# Altium PCB PCB1ControlDriver.PcbDoc
Units mm, origin at the board's own origin, x right, y up, seen from the top; angles counter-clockwise.
Board outline 137.5 x 77.5 mm, 2 copper layers (Top Layer, Bottom Layer), stack 1.671 mm thick; 51 components, 45 nets, 190 pads, 61 vias.
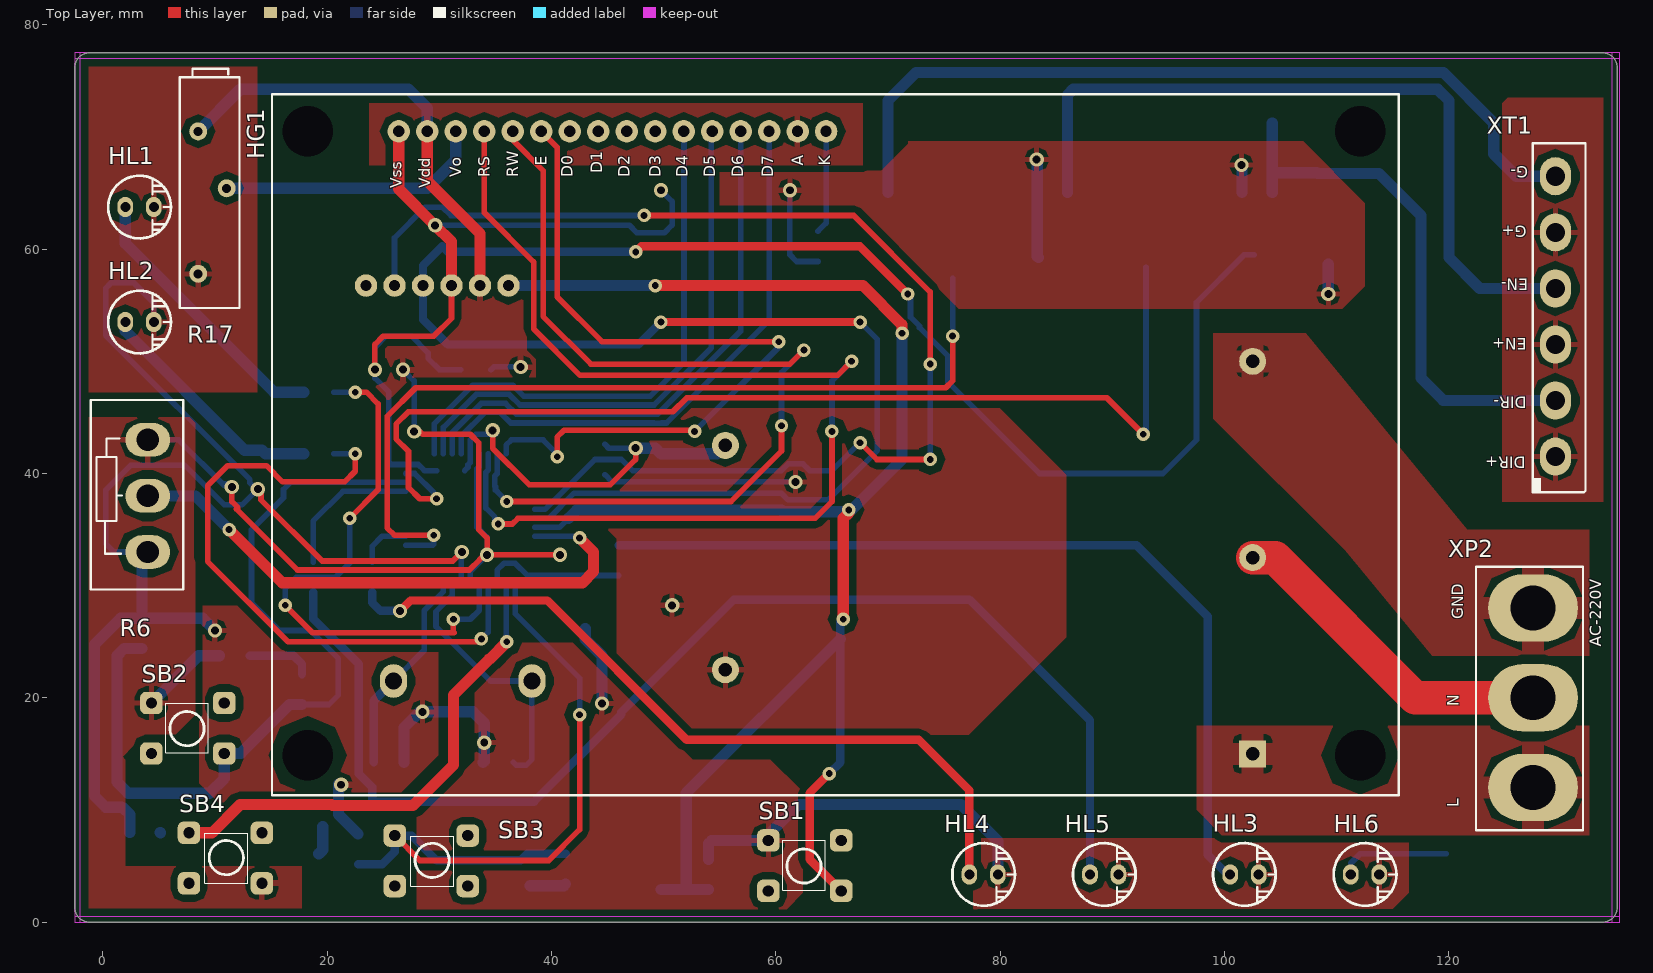
[diagram p0: Top Layer view]
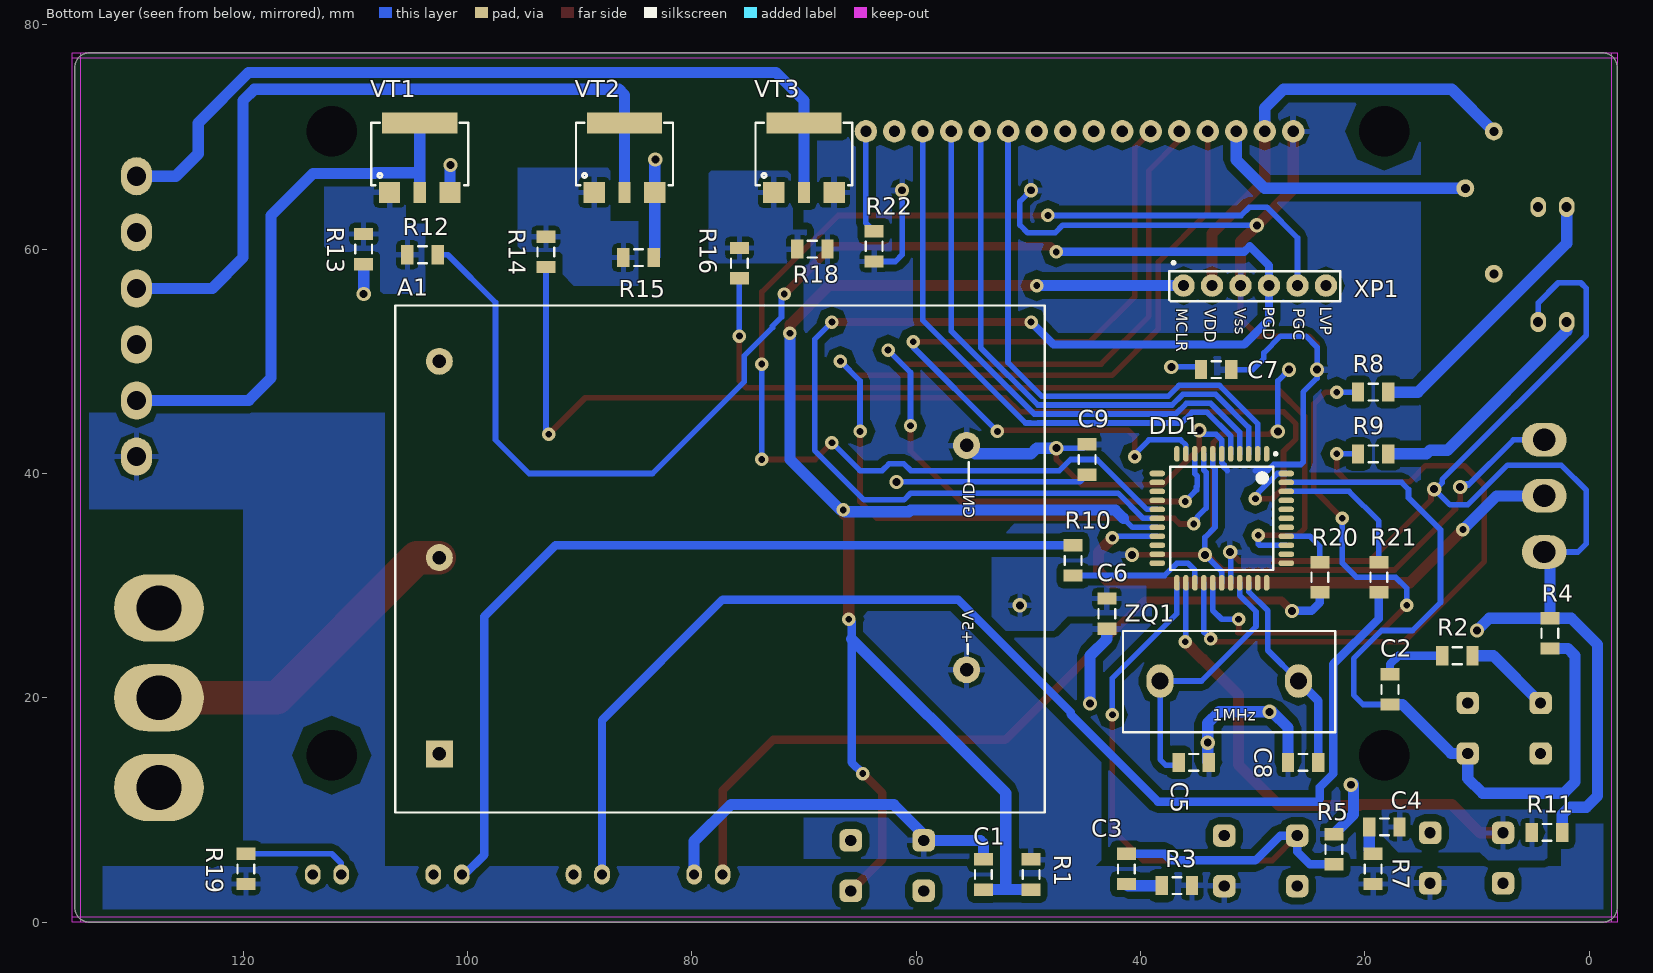
[diagram p1: Bottom Layer view, seen from below]

## Layer stack, top to bottom
Top Solder: solder mask 0.0102, Solder Resist, Dk 3.5
Top Layer: signal copper 0.0356
Dielectric 1: dielectric 1.6, FR-4, Dk 4.8
Bottom Layer: signal copper 0.0356
Bottom Solder: solder mask 0.0102, Solder Resist, Dk 3.5

## Board outline
-2.5,1.27 -2.5,76.23 cw(c-1.23,76.23) -1.23,77.5 133.73,77.5 cw(c133.73,76.23) 135,76.23 135,1.27 cw(c133.73,1.27) 133.73,0 -1.23,0 cw(c-1.23,1.27)

## Design rules (kind name [scope] priority, off if disabled: settings)
Clearance [All] p1: gap=0.5 ignorepadtopadclearanceinfootprint=FALSE except(0.3: Arc-Track Arc-SMDPad Track-Track Track-SMDPad SMDPad-SMDPad; 0.4: Arc-Via Track-Via; 0.6: Arc-Poly Arc-Region Track-Poly Track-Region SMDPad-Poly SMDPad-Region THPad-Poly THPad-Region Via-Poly Via-Region Fill-Poly Fill-Region Poly-Poly Poly-Region Region-Region; 1: Arc-Hole Track-Hole SMDPad-Hole THPad-Hole Via-Hole Fill-Hole Poly-Hole Region-Hole Text-Hole)
ComponentClearance [All] p1: gap=0.254 collisioncheckmode=3 verticalgap=0.1 showdistances=FALSE
PlaneClearance [InNetClass('POWER_AC')] p1: clearance=2
PlaneClearance PlaneClearance_5V [InNetClass('5V')] p2: clearance=0.6
PlaneClearance PlaneClearance_OUT [InNetClass('OUTPUT')] p3: clearance=0.6
PlaneClearance PlaneClearance_OTHER [InNetClass('Other')] p4: clearance=0.6
PlaneClearance PlaneClearance_CNET [InNetClass('ControlNet')] p5: clearance=0.6
PlaneConnect PlaneConnect_AC [InNetClass('POWER_AC')] p1: planeconnectstyle=Relief reliefexpansion=0.8 reliefentries=4 reliefconductorwidth=0.8 reliefairgap=0.4
PlaneConnect PlaneConnect_5V [InNetClass('5V')] p2: pad.planeconnectstyle=Relief pad.reliefexpansion=0.5 pad.reliefentries=4 pad.reliefconductorwidth=0.4 pad.reliefairgap=0.3 via.planeconnectstyle=Relief via.reliefexpansion=0.4 via.reliefentries=4 via.reliefconductorwidth=0.4 via.reliefairgap=0.3
PlaneConnect PlaneConnect_OUT [InNetClass('OUTPUT')] p3: pad.planeconnectstyle=Relief pad.reliefexpansion=0.5 pad.reliefentries=4 pad.reliefconductorwidth=0.4 pad.reliefairgap=0.3 via.planeconnectstyle=Relief via.reliefexpansion=0.4 via.reliefentries=4 via.reliefconductorwidth=0.4 via.reliefairgap=0.3
PlaneConnect PlaneConnect_OTHER [InNetClass('Other')] p4: pad.planeconnectstyle=Relief pad.reliefexpansion=0.5 pad.reliefentries=4 pad.reliefconductorwidth=0.4 pad.reliefairgap=0.3 via.planeconnectstyle=Relief via.reliefexpansion=0.4 via.reliefentries=4 via.reliefconductorwidth=0.4 via.reliefairgap=0.3
PlaneConnect PlaneConnect_CNET [InNetClass('ControlNet')] p5: pad.planeconnectstyle=Relief pad.reliefexpansion=0.5 pad.reliefentries=4 pad.reliefconductorwidth=0.4 pad.reliefairgap=0.3 via.planeconnectstyle=Relief via.reliefexpansion=0.4 via.reliefentries=4 via.reliefconductorwidth=0.4 via.reliefairgap=0.3
PolygonConnect [InNetClass('POWER_AC')] p1: connectstyle=Relief reliefconductorwidth=2 reliefentries=4 polygonreliefangle="90 Angle" airgapwidth=0.5
PolygonConnect PolygonConnect_5V [InNetClass('5V')] p2: connectstyle=Relief reliefconductorwidth=0.5 reliefentries=4 polygonreliefangle="90 Angle" airgapwidth=0.4
PolygonConnect PolygonConnect_OUT [InNetClass('OUTPUT')] p3: connectstyle=Relief reliefconductorwidth=0.5 reliefentries=4 polygonreliefangle="90 Angle" airgapwidth=0.4
PolygonConnect PolygonConnect_OTHER [InNetClass('Other')] p4: connectstyle=Relief reliefconductorwidth=0.5 reliefentries=4 polygonreliefangle="90 Angle" airgapwidth=0.4
PolygonConnect PolygonConnect_CNET [InNetClass('ControlNet')] p5: connectstyle=Relief reliefconductorwidth=0.5 reliefentries=4 polygonreliefangle="90 Angle" airgapwidth=0.4
RoutingVias [InNetClass('ControlNet')] p1: holewidth=0.6 width=1.2 viastyle="Through Hole" minholewidth=0.6 minwidth=1.2 maxholewidth=0.6 maxwidth=1.2
RoutingVias RoutingVias_OUT [InNetClass('OUTPUT')] p2: holewidth=1 width=1.8 viastyle="Through Hole" minholewidth=1 minwidth=1.8 maxholewidth=1 maxwidth=1.8
RoutingVias RoutingVias_CNET [(InNetClass('5V') AND InNetClass('ControlNet') AND InNetClass('Other'))] p3: holewidth=0.6 width=1.2 viastyle="Through Hole" minholewidth=0.6 minwidth=1.2 maxholewidth=0.6 maxwidth=1.2
SolderMaskExpansion [All] p1: expansion=0.102
Width AC_LEVEL [InNetClass('POWER_AC')] p1: maxlimit=5 minlimit=2 preferedwidth=4
Width LEVELOUT [InNetClass('OUTPUT')] p2: maxlimit=2 minlimit=1 preferedwidth=1.5
Width Level5V [(InNetClass('5V') AND InNetClass('ControlNet') AND InNetClass('Other'))] p3: maxlimit=1.5 minlimit=0.5 preferedwidth=1
27 further rules are at their usual default settings.

## Classes and differential pairs
net class POWER_AC: NetA1_1 NetA1_2 PGND
net class 5V: GND VCC
net class OUTPUT: DIR- EN- pulse-
net class ControlNet: BUT_DIR_LEFT BUT_DIR_RIGHT BUT_ON_OFF DB4 DB5 DB6 DB7 DIR DIR_LEFT DIR_RIGHT E EN IND_OFF IND_ON ON_OFF_GENERATOR PGC pulse REG RESET RS RW Vee
net class Other: NetC2_1 NetC3_1 NetC4_1 NetC5_2 NetC8_2 NetHG1_16 NetHL1_1 NetHL2_1 NetHL3_1 NetHL4_1 NetHL5_1 NetHL6_1 NetR12_2 NetR14_2 NetR16_2

## Components (designator, comment, footprint, x,y, rotation, side; value= is the part's Value field where it differs from the comment)
A1 "KAM0705" KAM705 102.5,32.5 r90 bottom value=220V/5V
C1 "47nF" CAP1206 54,4.25 r90 bottom
C2 "47nF" CAP1206 17.75,20.75 r270 bottom
C3 "47nF" CAP1206 41.25,4.75 r90 bottom
C4 "47nF" CAP1206 18.25,8.5 r180 bottom
C5 "15pF" CAP1206 35.25,14.25 r0 bottom
C6 "100nF" CAP1206 43,27.5 r270 bottom
C7 "100nF" CAP1206 33.25,49.25 r180 bottom
C8 "15pF" CAP1206 25.5,14.25 r180 bottom
C9 "100nF" CAP1206 44.75,41.25 r90 bottom
DD1 "PIC16F877A" TQFP80P1200X1200X120-44N 32.75,36 r270 bottom
HG1 "LM044L" LCD2004 26.378,70.5 r0 top
HL1 "GNL-3014" GNL-3014 2,63.75 r0 top value=RED
HL2 "GNL-3014" GNL-3014 2,53.5 r0 top value=RED
HL3 "GNL-3014" GNL-3014 100.5,4.25 r0 top value=RED
HL4 "GNL-3014" GNL-3014 77.25,4.25 r0 top value=RED
HL5 "GNL-3014" GNL-3014 88,4.25 r0 top value=RED
HL6 "GNL-3014" GNL-3014 111.25,4.25 r0 top value=RED
R1 "10k" 1206 49.75,4.25 r270 bottom value=1k
R2 "220" 1206 11.75,23.75 r180 bottom
R3 "220" 1206 36.75,3.25 r180 bottom
R4 "10k" 1206 3.5,25.75 r90 bottom
R5 "10k" 1206 22.75,6.5 r90 bottom
R6 "1kОм" "KC/C 16K1" 4,43 r270 top value=1000
R7 "220" 1206 19.25,4.75 r270 bottom
R8 "470" 1206 19.25,47.25 r180 bottom
R9 "470" 1206 19.25,41.75 r180 bottom
R10 "470" 1206 46,32.25 r90 bottom
R11 "10k" 1206 3.75,8 r180 bottom
R12 "470" 1206 104,59.5 r0 bottom
R13 "10k" 1206 109.25,60 r270 bottom
R14 "470" 1206 93,59.75 r90 bottom
R15 "10k" 1206 84.75,59.25 r180 bottom
R16 "470" 1206 75.75,58.75 r90 bottom
R17 "10kОм" 3006P 8.5,57.8 r90 top
R18 "10k" 1206 69.25,60 r180 bottom
R19 "470" 1206 119.75,4.75 r90 bottom
R20 "470" 1206 24,30.75 r270 bottom
R21 "470" 1206 18.75,30.75 r270 bottom
R22 "220" 1206 63.75,60.25 r90 bottom
SB1 "KAN0611-0901B" KLS2 62.5,5 r0 top value=100V
SB2 "KAN0611-0901B" KLS2 7.5,17.25 r0 top value=100V
SB3 "KAN0611-0901B" KLS2 29.355,5.506 r180 top value=100V
SB4 "KAN0611-0901B" KLS2 11,5.75 r180 top value=100V
VT1 "BCP56" SOT223 104.25,65.05 r180 bottom
VT2 "BCP56" SOT223 86,65.05 r180 bottom
VT3 "BCP56" SOT223 70,65.05 r180 bottom
XP1 "PLS-6" DS1021-6 36.16,56.75 r180 bottom value=100V
XP2 "AC-014" "Power AC-014" 127.5,12 r90 top value=220V
XT1 "KLS2-EDR-500-6P" KLS2-EDR-500-6P 129.5,41.5 r90 top value=15A300V
ZQ1 "1MHz" HC-51U 38.25,21.5 r180 bottom

## Footprints (in the part's own frame and the unit in brackets; to place one, negate y for a bottom-side part, rotate by r counter-clockwise, add the part's x,y. Pads: shape width x height; smd on the part's side, far side on the other; paste and mask are expansions set on the pad)
1206 [mm]
  rect 1.1x1.7 smd: 1(-1.35,0) 2(1.35,0)
  silkscreen extent -0.4,-0.75 0.4,0.75, body extent -1.55,-0.83 1.55,0.83, height 0.67
3006P [mm]
  round 1.6 hole 0.8: 1(0,0) 2(7.62,-2.54) 3(12.7,0)
  silkscreen extent -3.05,-3.68 18.29,1.65, body extent -3.05,-3.43 17.52,1.4, height 6.85
CAP1206 [mm]
  rect 1.1x1.7 smd: 1(-1.35,0) 2(1.35,0)
  silkscreen extent -0.4,-0.75 0.4,0.75, body extent -1.6,-0.8 1.6,0.8, height 1.25
DS1021-6 [mm]
  round 2 hole 1: 1(0,0) 2(2.54,0) 3(5.08,0) 4(7.62,0) 5(10.16,0) 6(12.7,0)
  silkscreen extent -1.27,-1.4 13.97,2.16, body extent -1.27,-1.27 13.97,7.35, height 5.45
GNL-3014 [mm]
  oval 1.4x1.8 hole 0.9: 1(0,0) 2(2.54,0)
  silkscreen extent -1.52,-2.79 4.06,2.79, body extent -0.72,-1.5 3.26,1.99, height 6.38
HC-51U [mm]
  oval 2.4x3 hole 1.5: 1(0,0) 2(12.34,0)
  silkscreen extent -3.3,-4.57 15.62,4.45, body extent -3.35,-4.61 15.65,4.39, height 20.5
KAM705 [mm]
  rect 2.4x2.4 hole 1.2: 1(-17.5,0)
  round 2.4 hole 1.2: 2(0,0) 3(17.5,0) 4(-10,-47) 5(10,-47)
  silkscreen extent -22.73,-53.98 22.48,3.94, body extent -22.5,-54 22.5,4, height 2.5
"KC/C 16K1" [mm]
  oval 3x4 hole 2: 1(0,0) 2(5,0) 3(10,0)
  silkscreen extent -3.56,-5.08 13.33,3.18, body extent -3.5,-33.97 13.4,5.33, height 23.45
KLS2 [mm]
  rrect50% 2x2 hole 1: 1(-3.175,2.286) 2(3.325,2.286) 3(-3.175,-2.214) 4(3.325,-2.214)
  silkscreen extent -1.91,-2.16 1.9,2.29, body extent -3.12,-3 3.38,3, height 7.5
KLS2-EDR-500-6P [mm]
  oval 3.4x2.8 hole 1.7: 1(0,0) 2(5,0) 3(10,0) 4(15,0) 5(20,0) 6(25,0)
  silkscreen extent -3.17,-2.67 27.94,2.03, body extent -3,-20.69 27.49,1.64, height 18.12
LCD2004 [mm]
  round 0 hole 4.5: 0(-8.128,-55.626) 0(-8.128,0) 0(85.725,-55.626) 0(85.725,0)
  round 2 hole 1: 1(0,0) 2(2.54,0) 3(5.08,0) 4(7.62,0) 5(10.16,0) 6(12.7,0) 7(15.24,0) 8(17.78,0) 9(20.32,0) 10(22.86,0) 11(25.4,0) 12(27.94,0) 13(30.48,0) 14(33.02,0) 15(35.56,0) 16(38.1,0)
  silkscreen extent -11.3,-59.18 89.15,3.3, body extent -11.34,-59.2 89.16,3.3, height 13.75
"Power AC-014" [mm]
  oval 6x8 hole 4: 1(0,0) 2(8,0) 3(16,0)
  silkscreen extent -3.81,-4.44 19.68,5.08
SOT223 [mm]
  rect 1.9x1.9 smd: 1(-2.7,0) 3(2.7,0)
  rect 1.1x1.9 smd: 2(0,0)
  rect 6.7x1.9 smd: 2(0,6.2)
  silkscreen extent -4.32,0.63 4.32,6.22, body extent -3.25,0.06 3.25,7.06, height 1.7
TQFP80P1200X1200X120-44N [mm] "TQFP, 44-Leads, Body 10,00x10,00mm, Pitch 0,80mm, IPC Medium Density"
  oval 1.4x0.5 smd: 1(-5.75,4) 2(-5.75,3.2) 3(-5.75,2.4) 4(-5.75,1.6) 5(-5.75,0.8) 6(-5.75,0) 7(-5.75,-0.8) 8(-5.75,-1.6) 9(-5.75,-2.4) 10(-5.75,-3.2) 11(-5.75,-4) 23(5.75,-4) 24(5.75,-3.2) 25(5.75,-2.4) 26(5.75,-1.6) 27(5.75,-0.8) 28(5.75,0) 29(5.75,0.8) 30(5.75,1.6) 31(5.75,2.4) 32(5.75,3.2) 33(5.75,4)
  oval 0.5x1.4 smd: 12(-4,-5.75) 13(-3.2,-5.75) 14(-2.4,-5.75) 15(-1.6,-5.75) 16(-0.8,-5.75) 17(0,-5.75) 18(0.8,-5.75) 19(1.6,-5.75) 20(2.4,-5.75) 21(3.2,-5.75) 22(4,-5.75) 34(4,5.75) 35(3.2,5.75) 36(2.4,5.75) 37(1.6,5.75) 38(0.8,5.75) 39(0,5.75) 40(-0.8,5.75) 41(-1.6,5.75) 42(-2.4,5.75) 43(-3.2,5.75) 44(-4,5.75)
  silkscreen extent -5.87,-4.6 4.6,4.92, body extent -6,-5.97 6,6.03, height 1.1

## Part data
A1: Manufacturer="CHINFA ELECTRONICS", Package=48x45x18.5, Part Number=KAM0705, Price=23, Quantity=1, ShoppingPlace=https://www.ru-chipdip.by/product/kam-0705
C1 C2 C3 C4: library part Capasitor, Manufacturer="FAITHFULL LINK", Package=1206, Part Number=120647nY5V-50V, Voltage=50V, Price=0,025, Quantity=4, ShoppingPlace=http://belchip.by/product/?selected_product=03137
C5 C8: library part Capasitor, Manufacturer=NPO, Package=1206, Part Number=1206150NPO, Voltage=1000V, Price=0,035, Quantity=2, ShoppingPlace=http://belchip.by/product/?selected_product=00257
C6 C7 C9: library part Capasitor, Manufacturer=Samsung, Package=1206, Part Number=CL31B104KBCNNNC, Voltage=50V, Price=0,015, Quantity=3, ShoppingPlace=http://belchip.by/product/?selected_product=03137
DD1: Manufacturer=Micchip, Package=TQFP-44, Part Number=PIC16F877A, Price=2.76, Quantity=1, ShoppingPlace=https://ru.aliexpress.com/item/Free-Shipping-5pcs-lot-PIC16F877A-PIC16F877A-I-PT-Microcontrollers-SMD-TQFP-44-new-original/32589109618.html?s=p&ws_ab_test=searchweb0_0,searchweb201602_2_10152_10151_10065_10344_10068_5722815_10342_10343_10340_5722915_10341_5722615_10697_10696_10084_10083_10618_10307_5722715_10059_10534_308_100031_10103_441_10624_10623_10622_5722515_10621_10620,searchweb201603_1,ppcSwitch_5&algo_expid=19ea4dca-365d-404e-8202-e740e16aa93f-5&algo_pvid=19ea4dca-365d-404e-8202-e740e16aa93f&transAbTest=ae803_2&priceBeautifyAB=0
HG1: Manufacturer=HITACHI, Package=16x2.54, Part Number=LM044L-HD44780U, Price=6.36, Quantity=1, ShoppingPlace=https://ru.aliexpress.com/item/LCD-Module-Display-2004-204-HD44780-Yellow-Green-Blacklight-FOR-ARDUINO/32627610997.html?ws_ab_test=searchweb0_0,searchweb201602_2_10152_10151_10065_10344_10068_5722815_10342_10343_10340_5722915_10341_5722615_10697_10696_10084_10083_10618_10307_5722715_10059_10534_308_100031_10103_441_10624_10623_10622_5722515_10621_10620,searchweb201603_1,ppcSwitch_5&algo_expid=81ba670d-1ac6-4fbd-8476-00369042280d-42&algo_pvid=81ba670d-1ac6-4fbd-8476-00369042280d&transAbTest=ae803_2&priceBeautifyAB=0
HL1 HL2 HL3 HL4 HL5 HL6: library part LED, Manufacturer=G-NOR, Package=GNL, Part Number=GNL-3014SRD, Price=0.04, Quantity=6, ShoppingPlace=http://belchip.by/product/?selected_product=00813
R1: library part Resistor, Manufacturer="Royal Ohm", Package=1206, Part Number=RC1206FR-071KL, Power=0,25W, Price=0,02, Quntity=4, ShoppingPlace=http://belchip.by/product/?selected_product=19295
R2 R3 R7 R22: library part Resistor, Manufacturer=YAGEO, Package=1206, Part Number=RC1206JR-07220L, Power=0,25W, Price=0,15, Quntity=4, ShoppingPlace=http://belchip.by/product/?selected_product=01368
R4 R5 R11 R13 R15 R18: library part Resistor, Manufacturer=YAGEO, Package=1206, Part Number=RC1206JR-0710KL, Power=0,25W, Price=0,15, Quntity=4, ShoppingPlace=http://belchip.by/product/?selected_product=31101
R6: library part POT-HG, Manufacturer=RUICHI, Package=5x5, Part Number=16K1, Power=0,125W, Price=0,6, Quantity=1, ShoppingPlace=http://belchip.by/product/?selected_product=04561
R8 R9 R10 R12 R14 R16 R19 R20 R21: library part Resistor, Manufacturer=YAGEO, Package=1206, Part Number=RC1206JR-07470RL, Power=0,25W, Price=0,15, Quntity=5, ShoppingPlace=http://belchip.by/product/?selected_product=32449
R17: library part POT, Manufacturer=Bours, Package=3006, Part Number=3006-103-Z-LF, Power=0,125W, Price=0,445, Quantity=1, ShoppingPlace=http://belchip.by/product/?selected_product=32831
SB1 SB2 SB3 SB4: library part Button, Manufacturer=RUICHI, Package=T112, Part Number=KAN0611-0901B, Price=0,05, Quantity=4, ShoppingPlace=http://belchip.by/product/?selected_product=14924
VT1 VT2 VT3: library part BCP56-16, Manufacturer="NXP Semiconductors", Package=SOT223, Part Number=BCP56-16, Price=BCP56, Quantity=2, ShoppingPlace=http://belchip.by/product/?selected_product=12583
XP1: library part PLS-6-1, Manufacturer=RUICHI, Package=DS2021-6, Part Number=PLS-40, Price=0,12, Quantity=1, ShoppingPlace=http://belchip.by/product/?selected_product=02009
XP2: library part "Power Connector AC-014", Manufacturer=RUICHI, Package=AC-015-8mm-step, Part Number=AC-014, Price=1.62, Quantity=1, ShoppingPlace=http://belchip.by/product/?selected_product=31383
XT1: Manufacturer=KLS, Package=KLS2-6, Part Number=KLS2-EDR-500-6P, Price=0,13, Quantity=1, ShoppingPlace=http://belchip.by/product/?selected_product=03190
ZQ1: library part Rzanator, Manufacturer=CHina, Package=HC-51, Part Number=HC-51, Price=13, Quantity=1, ShoppingPlace=https://ru.aliexpress.com/item/1-MHz-Quartz-Crystal-Resonator-HC-51-U-1-000-MHz-1000-KHz/32542776281.html?ws_ab_test=searchweb0_0,searchweb201602_2_10152_10151_10065_10344_10068_10342_10343_10340_10341_10697_10696_10084_5722520_10083_10618_10307_10059_5722620_5722920_10534_308_5722720_5722820_100031_10103_441_10624_10623_10622_10621_10620,searchweb201603_68,ppcSwitch_5&algo_expid=89d4295e-121a-47e9-b7f5-26405723b7a9-0&algo_pvid=89d4295e-121a-47e9-b7f5-26405723b7a9&transAbTest=ae803_2&priceBeautifyAB=0

## Via types
v1: diameter 1.2, hole 0.6, Top Layer to Bottom Layer, 36 vias
v2: diameter 1.27, hole 0.711, Top Layer to Bottom Layer, 25 vias

## Nets (pads, with @x,y where several pads share a name; then routed paths per layer and width w, separated by ;. In a path a pad name is that pad's centre, name@x,y a point inside that pad or via, vN(x,y) a via of type N, cw(c..) or ccw(c..) an arc to the next point about the centre after c; other vN are vias at no path point)
BUT_DIR_LEFT: C3.2 DD1.23 R5.1 SB3.4 | length 64.5
  Top Layer w0.5: SB3.4 28.25,5.5 39.75,5.5 42.5,8.25 v1(42.5,18.5)
  Bottom Layer w0.5: DD1.23 36.75,27.5 42.5,21.75 v1(42.5,18.5)
  Bottom Layer w0.75: R5.1 24.9,5.15 26.03,6.28 SB3.4 27.53,7.72 29.75,5.5 37.25,5.5 37.85,6.1 C3.2
BUT_DIR_RIGHT: C4.2 DD1.24 R11.1 SB4.4 | length 44.5
  Top Layer w1: SB4.4 9.714,7.964 12.25,10.5 20.376,10.5 20.481,10.394 27.644,10.394 31.25,14 31.25,20.25 34.45,23.45 34.496,23.45 36,24.954 v1(36,25)
  Bottom Layer w0.5: DD1.24 35.95,25.05 v1(36,25)
  Bottom Layer w1: R11.1 R11.1@5.136,7.964
BUT_ON_OFF: C2.2 DD1.43 R4.1 SB2.4 | length 74.3
  Bottom Layer w0.5: C2.2 20.15,19.4 21,20.25 21,23.5 18.5,26 15.75,26 13.25,28.5 13.25,34.979 16.106,37.835 16.106,38.585 16.721,39.2 DD1.43
  Bottom Layer w1: R4.1 1.9,24.4 1.25,23.75 1.25,12.5 2.25,11.5 9.5,11.5 10.825,12.825 SB2.4 12.286,15.036 16.65,19.4 C2.2
DB4: DD1.2 HG1.11 | length 48.6
  Bottom Layer w0.5: DD1.2 29.55,44.444 32.956,47.85 36.565,47.85 37.515,46.9 48.814,46.9 51.803,49.889 51.803,70.475 HG1.11
DB5: DD1.3 HG1.12 | length 49.3
  Bottom Layer w0.5: DD1.3 30.35,44.113 33.287,47.05 36.233,47.05 37.183,46.1 49.145,46.1 54.25,51.205 54.25,70.432 HG1.12
DB6: DD1.4 HG1.13 | length 50
  Bottom Layer w0.5: DD1.4 31.15,41.787 31.15,43.663 33.737,46.25 35.902,46.25 36.852,45.3 49.463,45.3 ; 49.463,45.287 56.858,52.681 HG1.13
DB7: DD1.5 HG1.14 | length 51
  Bottom Layer w0.5: DD1.5 31.95,43.331 34.069,45.45 35.415,45.45 36.365,44.5 49.119,44.5 49.132,44.487 49.795,44.487 49.808,44.5 50.25,44.5 59.398,53.648 HG1.14
DIR: DD1.17 R12.1 XP1.4 | length 192.5
  Top Layer w0.75: v1(47.5,59.75) 48,60.25 67.5,60.25 v1(71.75,56) ; v1(49.75,53.5) v1(67.5,53.5)
  Bottom Layer w0.5: DD1.17 39.75,36 42,38.25 60.479,38.25 61.085,37.644 64.644,37.644 69.05,42.05 69.05,51.95 v1(67.5,53.5) ; v1(71.75,56) 72,55.75 72,53.942 72.8,53.142 72.8,53.008 75.308,50.5 75.308,48.192 83.5,40 94.5,40 97.5,43 97.5,55.25 101.75,59.5 R12.1
  Bottom Layer w0.75: v1(47.5,59.75) 30.75,59.75 30.25,60.25 28.54,58.54 XP1.4 28.54,53.71 30.75,51.5 47.75,51.5 v1(49.75,53.5)
DIR-: VT1.2 XT1.2 | length 48.4
  Bottom Layer w1: VT1.2@104.25,65.05 104.25,66.8 ; VT1.2@104.25,71.25 104.25,66.8 ; XT1.2 119.5,46.5 117.5,48.5 117.5,63 113.75,66.75 108.281,66.75 108.231,66.8 104.25,66.8
DIR_LEFT: DD1.26 R9.1 | length 57.8
  Top Layer w0.5: v1(22.5,41.75) 22.5,40.2 21.55,39.25 16.021,39.25 14.571,40.7 11.129,40.7 9.334,38.905 9.334,32.166 16.5,25 33.5,25 v1(33.75,25.25)
  Bottom Layer w0.5: R9.1 v1(22.5,41.75) ; v1(33.75,25.25) 34.35,25.85 DD1.26
DIR_RIGHT: DD1.27 R8.1 | length 50.2
  Top Layer w0.5: v1(16.25,28.25) 18.7,25.8 31.3,25.8 31.25,25.85 v1(31.25,27) ; v1(22,36) 24.544,38.544 24.544,46.206 23.5,47.25 v1(22.5,47.25)
  Bottom Layer w0.5: v1(16.25,28.25) 16.25,29.75 17.25,30.75 20.75,30.75 22,32 v1(22,36) ; R8.1 v1(22.5,47.25) ; v1(31.25,27) 32.75,27 33.55,27.8 DD1.27
E: DD1.10 HG1.6 | length 68.4
  Top Layer w0.5: HG1.6 40.5,69.078 40.5,55.75 44.5,51.75 v1(60.25,51.75) ; v1(40.5,41.5) 40.5,43.25 41.106,43.856 52.644,43.856 v1(52.75,43.75)
  Bottom Layer w0.5: DD1.10 35.95,42.531 36.419,43 39.25,43 40.5,41.75 v1(40.5,41.5) ; v1(52.75,43.75) 60.25,51.25 v1(60.25,51.75)
EN: DD1.44 R14.1 | length 96.8
  Top Layer w0.5: v1(29.75,37.75) 28.25,37.75 27.25,38.75 27.25,41.979 26.144,43.085 26.144,44.415 27.229,45.5 50.808,45.5 52.058,46.75 89.5,46.75 v1(92.75,43.5)
  Bottom Layer w0.5: DD1.44 27.787,40 29.5,38.287 29.5,38 v1(29.75,37.75) ; v1(92.75,43.5) 93,43.75 R14.1
EN-: VT2.2 XT1.4 | length 68
  Bottom Layer w1: VT2.2@86,65.05 86,71.25 86,73.75 86.5,74.25 119,74.25 120,73.25 120,59.25 122.75,56.5 XT1.4
GND: A1.5 C1.2 C5.1 C6.2 C7.2 C8.1 C9.2 DD1.6 DD1.29 HG1.1 HL1.2 HL2.2 HL3.2 HL4.2 HL5.2 HL6.2 R4.2 R5.2 R6.3 R11.2 R13.2 R15.2 R17.1 R18.2 R22.1 SB1.1 VT1.3 VT2.3 VT3.3 XP1.3 | length 315.1
  Top Layer w0.5: v2(13.812,38.601) 13.899,38.601 14.1,38.4 14.1,37.65 19.556,32.194 31.194,32.194 v2(32,33) ; v2(24.25,49.25) 24.25,51.5 25,52.25 29.5,52.25 31.08,53.83 XP1.3 ; v2(34.75,43.844) 34.75,42.25 38,39 45.25,39 47.5,41.25 v2(47.5,42.25)
  Top Layer w1: HG1.1 26.378,65.372 v2(29.625,62.125) 31.08,60.67 XP1.3 ; HL5.2@90.54,3.96 HL5.2
  Bottom Layer w0.5: R6.3 1,33 0.25,33.75 0.25,38.5 2.5,40.75 7.279,40.75 10.835,37.194 12.406,37.194 13.521,38.309 v2(13.812,38.601) ; HL2.2 4.54,55.21 2.75,57 0.75,57 0.25,56.5 0.25,52.321 13.106,39.465 13.106,39.159 13.665,38.601 v2(13.812,38.601) ; v2@14.2,38.601 v2(13.812,38.601) ; v2(29.625,62.125) 46.933,62.125 47.608,61.45 50.05,61.45 50.75,62.15 50.75,64.25 v2(49.75,65.25) ; 29.75,40.25 28.669,40.25 28.119,40.8 25.7,40.8 25.5,41 25.5,47.25 24.25,48.5 v2(24.25,49.25) 24.25,51.25 25.25,52.25 27.5,52.25 29,50.75 29,50.25 30,49.25 C7.2 ; DD1.29 31.95,32.95 v2(32,33) ; 32.25,40.25 32.55,40.55 32.55,40.769 32.75,40.969 DD1.6 32.75,43 33.25,43.5 35,43.5 34.75,43.75 v2(34.75,43.844) ; C9.2 45.1,42.25 v2(47.5,42.25) ; v2(61.25,65.25) 61.25,59.5 61.85,58.9 R22.1
  Bottom Layer w1: R11.2 2.4,9.6 1.8,10.2 1.712,10.2 1.662,10.25 0.25,10.25 -0.75,11.25 -0.75,24.75 1.6,27.1 R4.2 ; R6.3 3.5,32.5 R4.2 ; v2(10,26) 8.9,27.1 R4.2 ; v2(21.25,12.25) 21.071,12.25 21,12.321 21,9.6 R5.2 ; C8.1 26.85,17.35 28.25,18.75 v2(28.5,18.75) 33,18.75 34,17.75 v2(34,16) 34,14.35 C5.1 ; C6.2 43,25.25 44.5,23.75 v2(44.5,19.5) ; v2(47.5,42.25) 49.25,42.25 49.75,41.75 54.75,41.75 A1.5 ; C1.2 54,7 54.286,7.286 SB1.1 59.325,7.825 62,10.5 76.5,10.5 79.79,7.21 HL4.2 ; v2(83.25,68) 83.3,67.95 VT2.3 83.3,59.35 R15.2 ; v2(101.5,67.5) 101.55,67.45 VT1.3 ; v2(109.25,56) R13.2
IND_OFF: DD1.42 R21.1 | length 13
  Bottom Layer w0.5: R21.1 18.75,35.75 21.4,38.4 DD1.42
IND_ON: DD1.37 R20.1 | length 4.8
  Bottom Layer w0.5: R20.1 24,33.5 24.9,34.4 DD1.37
NetA1_1: A1.1 XP2.1
NetA1_2: A1.2 XP2.2 | length 30.2
  Top Layer w3: A1.2 104.5,32.5 117,20 XP2.2
NetC2_1: C2.1 R2.1 | length 5.9
  Bottom Layer w0.75: R2.1 17,23.75 17.75,23 C2.1
NetC3_1: C3.1 R3.1 | length 3.2
  Bottom Layer w1: R3.1 41.1,3.25 C3.1
NetC4_1: C4.1 R7.1 | length 2.5
  Bottom Layer w1: R7.1 19.6,6.45 C4.1
NetC5_2: C5.2 DD1.30 ZQ1.1 | length 24
  Bottom Layer w0.5: DD1.30 31.15,29.137 29.7,27.687 29.7,26.358 34.558,21.5 ZQ1.1 38.25,14.5 37.75,14 36.85,14 C5.2
NetC8_2: C8.2 DD1.31 ZQ1.2 | length 18.6
  Bottom Layer w0.5: ZQ1.2 28.65,24.24 28.65,27.769 30.35,29.469 DD1.31
  Bottom Layer w0.75: C8.2 24.15,19.74 ZQ1.2
NetHG1_16: HG1.16 R22.2 | length 9.2
  Bottom Layer w0.5: R22.2 64.478,62.328 HG1.16
NetHL1_1: HL1.1 R8.2 | length 24.6
  Bottom Layer w1: HL1.1 2,60.5 15.25,47.25 R8.2
NetHL2_1: HL2.1 R9.2 | length 21.2
  Bottom Layer w1: HL2.1 2,52.7 12.632,42.068 14.188,42.068 14.506,41.75 R9.2
NetHL3_1: HL3.1 R10.2 | length 79.1
  Bottom Layer w0.75: R10.2 92.15,33.6 98.5,27.25 98.5,6 100.25,4.25 HL3.1
NetHL4_1: HL4.1 R20.2 | length 69.4
  Top Layer w0.75: v2(26.5,27.75) 27.425,28.675 39.625,28.675 52.05,16.25 72.75,16.25 77.25,11.75 HL4.1
  Bottom Layer w0.75: R20.2 24,28.5 24.75,27.75 v2(26.5,27.75)
NetHL5_1: HL5.1 R21.2 | length 110.5
  Bottom Layer w0.75: R21.2 18.75,27.058 22.82,22.988 22.82,13.225 24,12.045 24,11 24.25,10.75 38.447,10.75 46.231,18.533 46.231,18.731 56.25,28.75 77.25,28.75 88,18 HL5.1
NetHL6_1: HL6.1 R19.2 | length 9.9
  Bottom Layer w0.5: HL6.1 111.25,5.25 112.1,6.1 R19.2
NetR12_2: R12.2 R13.1 VT1.1
NetR14_2: R14.2 R15.1 VT2.1
NetR16_2: R16.2 R18.1 VT3.1
ON_OFF_GENERATOR: DD1.25 R10.1 | length 12.7
  Bottom Layer w0.5: DD1.25 35.15,31.379 35.771,32 36.75,32 37.85,30.9 R10.1
PGC: DD1.16 XP1.5 | length 110.9
  Top Layer w0.5: v1(48.25,63) 66.942,63 73.75,56.192 v1(73.75,49.75) ; v1(67.5,42.75) 69,41.25 v1(73.75,41.25)
  Bottom Layer w0.5: XP1.5 26,61 28.731,63.731 30.29,63.731 31.021,63 v1(48.25,63) ; DD1.16 39.419,36.8 43.869,41.25 46.229,41.25 47.229,40.25 60.479,40.25 61.085,40.856 62.415,40.856 63.021,40.25 65,40.25 v1(67.5,42.75) ; v1(73.75,41.25) v1(73.75,49.75)
PGND: A1.3 XP2.3
pulse: DD1.36 R16.1 | length 78.6
  Top Layer w0.5: v1(29.5,34.5) 26,34.5 25.344,35.156 25.344,45.094 27.894,47.644 75.144,47.644 75.75,48.25 v1(75.75,52.25)
  Bottom Layer w0.5: DD1.36 29.4,33.6 29.5,33.7 v1(29.5,34.5) ; v1(75.75,52.25) R16.1
pulse-: VT3.2 XT1.6 | length 74.2
  Bottom Layer w1: VT3.2@70,65.05 70,71.25 70,73.25 72.5,75.75 119.5,75.75 124,71.25 124,68.5 126,66.5 XT1.6
REG: DD1.19 R6.2 | length 51
  Top Layer w1: v1(11.25,35) 16,30.25 42.75,30.25 43.75,31.25 43.75,33 v1(42.5,34.25)
  Bottom Layer w0.5: DD1.19 42.35,34.4 v1(42.5,34.25)
  Bottom Layer w1: R6.2 8.25,38 v1(11.25,35)
RESET: C1.1 DD1.18 R1.2 SB1.4 XP1.1 | length 152.8
  Top Layer w0.75: v1(64.75,13.25) 63,11.5 63,5.611 SB1.4
  Top Layer w1: v1(49.25,56.75) 67.75,56.75 71.25,53.25 v1(71.25,52.5) ; v1(66,27) 66,36 66.5,36.5 v1(66.5,36.75)
  Bottom Layer w0.5: DD1.18 40.7,35.2 41.5,36
  Bottom Layer w0.75: v1(64.75,13.25) 65.75,14.25 65.75,25.25 65.75,26.75 v1(66,27)
  Bottom Layer w1: XP1.1 v1(49.25,56.75) ; 41.5,36 42.25,36.75 60.494,36.75 60.65,36.594 66.344,36.594 v1(66.5,36.75) 66.75,36.75 71.25,41.25 v1(71.25,52.5) ; R1.2 52,2.9 ; C1.1 52,2.9 ; 65.75,25.25 52,11.5 52,2.9
RS: DD1.8 HG1.4 | length 100.6
  Top Layer w0.5: HG1.4 33.998,63.252 38.4,58.85 38.4,52.9 42.55,48.75 65.5,48.75 v1(66.75,50) ; v1(35.25,35.5) 36.5,35.5 37,36 63.5,36 65,37.5 v1(65,43.75)
  Bottom Layer w0.5: DD1.8 34.35,40.969 34.35,40.306 34.15,40.106 34.15,36.908 34.95,36.108 34.95,35.8 v1(35.25,35.5) ; v1(65,43.75) 65,48.25 v1(66.75,50)
RW: DD1.9 HG1.5 | length 84.4
  Top Layer w0.5: v1(36,37.5) 35.75,37.5 56,37.5 60.5,42 v1(60.5,44.25) ; HG1.5 36.538,69.712 39.25,67 39.25,54 43.5,49.75 61.25,49.75 v1(62.5,51)
  Bottom Layer w0.5: 35,38.5 35,38.808 34.95,38.858 34.95,39.775 35.15,39.975 DD1.9 ; 35.15,38.4 36,37.55 v1(36,37.5) ; v1(60.5,44.25) 60.5,49 v1(62.5,51)
VCC: A1.4 C6.1 C7.1 C9.1 DD1.7 DD1.28 HG1.2 HG1.15 R1.1 R2.2 R3.2 R6.1 R7.2 R17.3 R19.1 SB2.1 SB3.1 SB4.1 XP1.2 XT1.1 XT1.3 XT1.5 | length 147.6
  Top Layer w0.5: v2(11.5,38.8) 11.5,37.491 12.035,36.955 11.915,36.835 17.356,31.394 32.665,31.394 33.606,32.335 33.606,32.356 34,32.75 v2(34.25,32.75) ; v2(27.75,43.75) 28.25,43.75 28.5,43.5 32.75,43.5 33.5,42.75 33.5,35 34.25,34.25 v2(34.25,32.75) ; v2@36.99,49.5 v2(37.25,49.5) ; v2(40.75,32.75) v2(34.25,32.75)
  Top Layer w1: SB4.1@13.786,3.464 SB4.1 ; HG1.2 28.918,66.082 33.62,61.38 XP1.2
  Bottom Layer w0.5: R6.1 6.75,43 10.776,38.974 10.896,39.094 11.191,38.8 v2(11.5,38.8) ; v2(26.75,49.25) 27.75,48.25 v2(27.75,43.75) v2@27.5,43.5 ; DD1.28 32.75,31.25 v2(34.25,32.75) 34.25,34.308 33.35,35.208 33.35,40.437 33.55,40.637 DD1.7 ; C7.1 34.85,49.5 v2(37.25,49.5) ; v2(40.75,32.75) v2@40.8,32.7 ; C9.1 45.4,39.25 v2(61.75,39.25)
  Bottom Layer w1: SB2.1 8.539,23.75 R2.2 ; R17.3 12.25,74.25 27.25,74.25 28.918,72.582 HG1.2
  other v2: 50.75,28.25
Vee: HG1.3 R17.2 | length 24
  Bottom Layer w1: R17.2 28.92,65.42 31.458,67.958 HG1.3
pads on no net: DD1.1 DD1.11 DD1.12 DD1.13 DD1.14 DD1.15 DD1.20 DD1.21 DD1.22 DD1.32 DD1.33 DD1.34 DD1.35 DD1.38 DD1.39 DD1.40 DD1.41 HG1.0 HG1.7 HG1.8 HG1.9 HG1.10 SB1.2 SB1.3 SB2.2 SB2.3 SB3.2 SB3.3 SB4.2 SB4.3 XP1.6

## Polygon pours and split planes (outlines as drawn)
VCC on Top Layer "Top Overlay-No Net" (solid, remove dead copper, pour order 16): 17.75,5 17.75,1.25 -1.25,1.25 -1.25,45 7.75,45 8.25,44.5 8.25,18.5 6.5,16.75 3.75,16.75 1.75,14.75 2,14.5 2,5
GND on Top Layer "Top Overlay-No Net" (solid, remove dead copper, pour order 27): -1.25,76.25 13.75,76.25 13.75,47.25 -1.25,47.25
VCC on Top Layer "Top Overlay-No Net" (solid, remove dead copper, pour order 20): 23.75,67.5 23.75,73 67.75,73 67.75,67.5
VCC on Top Layer "Top Overlay-No Net" (solid, remove dead copper, pour order 14): 133.75,37.5 124.75,37.5 124.75,73 125.25,73.5 133.75,73.5
NetA1_1 on Top Layer "Top Overlay-No Net" (solid, remove dead copper, pour order 0): 132.5,7.75 99.75,7.75 97.5,10 97.5,17.5 132.5,17.5
PGND on Top Layer "Top Overlay-No Net" (solid, remove dead copper, pour order 2): 110.75,33.148 99,44.898 99,52.5 107.22,52.5 121.621,35 132.5,35 132.5,23.75 118.509,23.75
GND on Top Layer "Top Overlay-No Net" (solid, remove dead copper, pour order 35): 8.6,28.2 8.6,12.4 10.3,10.7 25.7,10.7 29.9,14.9 29.9,28.2
GND on Top Layer "Top Overlay-No Net" (solid, remove dead copper, pour order 37): 28,9.4 28.1,9.4 33.15,14.45 33.15,20.65 37.4,24.9 42.2,24.9 52.6,14.5 59.5,14.5 62.4,11.6 62.4,2.6 60.8,1 28,1
VCC on Top Layer "Top Overlay-No Net" (solid, remove dead copper, pour order 39): 42.3,35 45,35 45.8,34.2 45.8,23.2 52.3,16.7 77.2,16.7 85.9,25.4 85.9,39.9 79.7,46.1 50,46.1 42.3,38.4
GND on Top Layer "Top Overlay-No Net" (solid, remove dead copper, pour order 41): 55,67 55,63.5 67.5,63.5 76.3,54.7 110.5,54.7 112.5,56.7 112.5,64.1 107,69.6 71.8,69.6 71.8,69.4 69.4,67
GND on Top Layer "Top Overlay-No Net" (solid, remove dead copper, pour order 43): 77.6,7.5 77.6,1.2 77.7,1.1 77.9,1.1 78,1.2 115,1.2 116.4,2.6 116.4,7.5
VCC on Top Layer "Top Overlay-No Net" (solid, remove dead copper, pour order 45): 23.5,50 23.5,47.949 24.874,46.575 37.175,46.575 38.6,48 38.6,50.2 37.8,51 37.8,58 37.1,58.7 23.6,58.7
VCC on Bottom Layer "Top Overlay-No Net" (solid, remove dead copper, pour order 47): 107.369,4.6 107.369,37.354 107.369,45.4 133.73,45.4 133.73,36.793 120,36.793 120,7.3 132.5,7.3 132.5,4.6 122.303,4.6
GND on Bottom Layer "Top Overlay-No Net" (solid, remove dead copper, pour order 33): 15,75 70,75 70,5 15,5
VCC on Bottom Layer "Top Overlay-No Net" (solid, remove dead copper, pour order 22): 51.25,5.25 50.5,4.5 44.5,4.5 43.5,5.5 43.5,14.25 57,27.75 64.25,27.75 65,27 65,25.75 51.25,12
VCC on Bottom Layer "Top Overlay-No Net" (solid, remove dead copper, pour order 6): -1.25,8.75 -1.25,0.5 132.5,0.5 132.5,5 2.5,5 2.5,8.75
GND on Bottom Layer "Top Overlay-No Net" (solid, remove dead copper, pour order 29): 63.5,57.25 69.25,57.25 69.75,57.75 69.75,66 69,66.75 63.5,66.75
GND on Bottom Layer "Top Overlay-No Net" (solid, remove dead copper, pour order 25): 28,42.5 28,31 33.5,31 34.5,32 34.5,42.5
VCC on Bottom Layer "Top Overlay-No Net" (solid, remove dead copper, pour order 18): 39,27.25 46.5,27.25 47.75,26 52.5,26 53.25,26.75 53.25,31 53.25,33.5 51.25,35.5 41,35.5 41,35.25 39.5,33.75 39.5,28.5 39,28
BUT_DIR_RIGHT on Bottom Layer "Top Overlay-No Net" (solid, remove dead copper, pour order 4): 3.75,10 3.75,5.75 4,5.5 9,5.5 9.75,6.25 17,6.25 18.5,7.75 18.5,10
NetR16_2 on Bottom Layer "Top Overlay-No Net" (solid, remove dead copper, pour order 8): 69.75,61.75 69.75,58.75 78,58.75 78.5,59.25 78.5,66.75 78.25,67 71.5,67 71,66.5 71,61.75
NetR14_2 on Bottom Layer "Top Overlay-No Net" (solid, remove dead copper, pour order 10): 84.75,62.5 84.75,56.75 90.5,56.75 91.5,57.75 91.5,59.5 91.75,59.75 95,59.75 95.5,60.25 95.5,67.25 87.5,67.25 87.25,67 87.25,62.5
NetR12_2 on Bottom Layer "Top Overlay-No Net" (solid, remove dead copper, pour order 12): 103.75,62.25 103.75,56.25 104,56 107.5,56 107.75,56.25 107.75,59.5 108,59.75 112.25,59.75 112.75,60.25 112.75,65.75 111.75,66.75 105.5,66.75 105.5,62.25

## Keep-outs
Keep-Out Layer:
  rectangle: -2.5,0 135.25,0.5
  rectangle: 134.5,0 135.25,77.5
  rectangle: -2.5,77 135.25,77.5
  rectangle: -2.5,0 -2,77.5

## Silkscreen, mask and mechanical layers (free items; w line width, h text height)
Bottom Overlay:
  lines w0.2: 55.3,39 55.3,41 ; 55.4,23.9 55.4,24.8
  text "GND" at 55.8,36 h1 r90
  text "+5V" at 55.9,24.8 h1 r90
Board:
  lines w0.2: -2.5,2.5 -2.5,1.27 ccw(c-1.23,1.27) -1.23,0 2.5,0 ; -2.5,75 -2.5,76.23 cw(c-1.23,76.23) -1.23,77.5 0,77.5 ; 132.5,0 133.73,0 ccw(c133.73,1.27) 135,1.27 135,2.5 ; 132.5,77.5 133.73,77.5 cw(c133.73,76.23) 135,76.23 135,75
  lines w0.254: -2.5,2.5 -2.5,75 ; 0,77.5 132.5,77.5 ; 2.5,0 132.5,0 ; 135,2.5 135,75

## Text inside footprints (layer, text, board x,y; h text height)
HG1: Top Overlay "K" at 64.859,67.419 h1 r90; Top Overlay "A" at 62.446,67.419 h1 r90; Top Overlay "D7" at 59.779,66.42 h1 r90; Top Overlay "D6" at 57.112,66.42 h1 r90; Top Overlay "D5" at 54.572,66.42 h1 r90; Top Overlay "D4" at 52.159,66.42 h1 r90; Top Overlay "D3" at 49.746,66.42 h1 r90; Top Overlay "D2" at 46.952,66.42 h1 r90; Top Overlay "D1" at 44.539,66.753 h1 r90; Top Overlay "D0" at 41.872,66.42 h1 r90; Top Overlay "E" at 39.586,67.419 h1 r90; Top Overlay "RW" at 37.046,66.42 h1 r90; Top Overlay "RS" at 34.506,66.42 h1 r90; Top Overlay "Vo" at 31.966,66.42 h1 r90; Top Overlay "Vdd" at 29.172,65.42 h1 r90; Top Overlay "Vss" at 26.632,65.42 h1 r90
XP1: Bottom Overlay "PGC" at 26.381,54.718 h1 r90; Bottom Overlay "LVP" at 23.968,54.845 h1 r90; Bottom Overlay "Vss" at 31.588,54.718 h1 r90; Bottom Overlay "PGD" at 29.048,54.845 h1 r90; Bottom Overlay "VDD" at 34.255,54.718 h1 r90; Bottom Overlay "MCLR" at 36.795,54.718 h1 r90
XP2: Top Overlay "GND" at 121.277,26.986 h1 r90; Top Overlay "N" at 120.896,19.239 h1 r90; Top Overlay "L" at 120.896,10.222 h1 r90; Top Overlay "AC-220V" at 133.596,24.573 h1 r90
XT1: Top Overlay "DIR-" at 126.96,46.834 h1 r180; Top Overlay "DIR+" at 126.833,41.5 h1 r180; Top Overlay "EN+" at 126.96,52.041 h1 r180; Top Overlay "EN-" at 127.087,57.375 h1 r180; Top Overlay "G+" at 126.96,62.074 h1 r180; Top Overlay "G-" at 127.087,67.408 h1 r180